# Altium PCB xiaoban.PcbDoc (part 2 of 2)
Units mm, origin at the board's own origin, x right, y up, seen from the top; angles counter-clockwise.
Board outline 80.34 x 99.39 mm, 2 copper layers (Top Layer, Bottom Layer); 120 components, 25 nets, 528 pads, 380 vias.
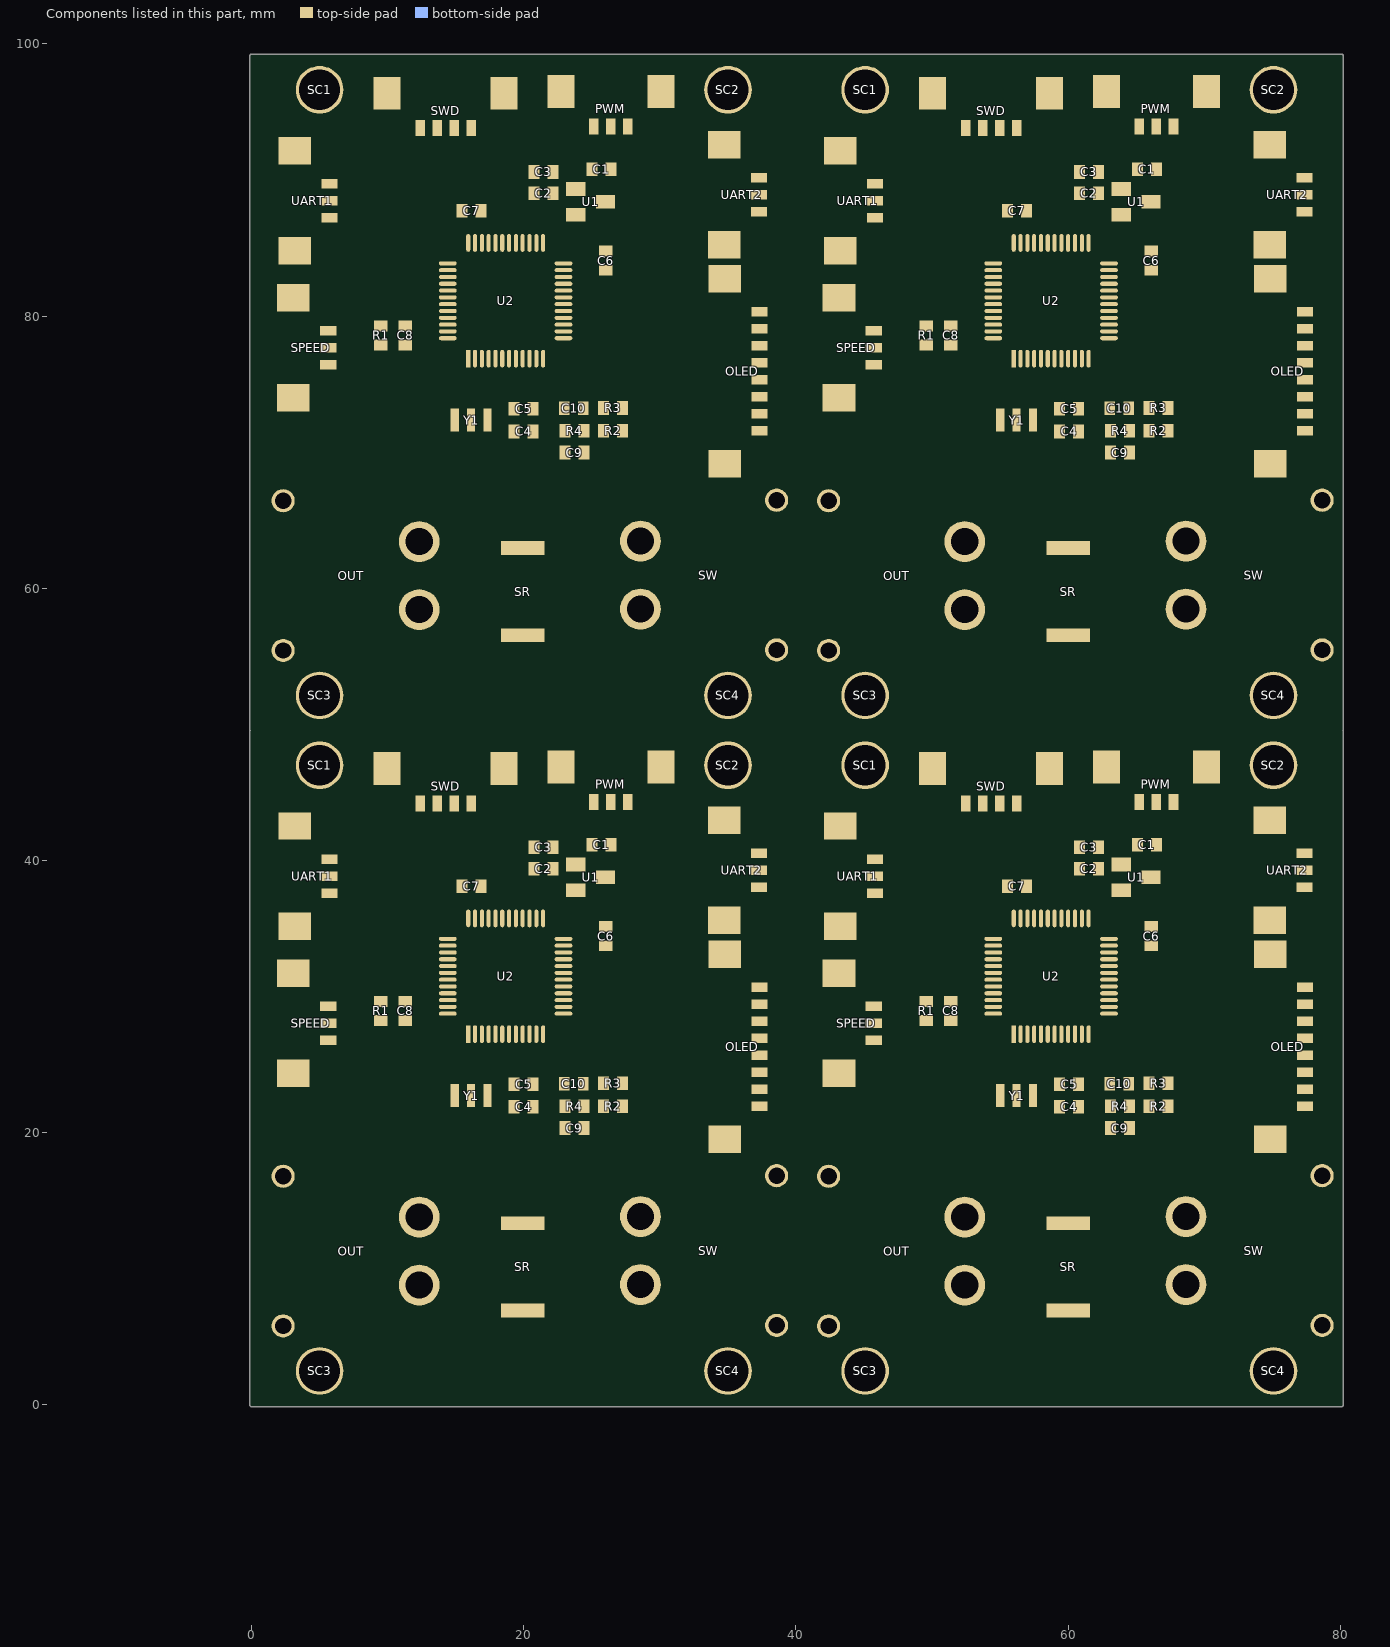
[diagram p2: the components of this part, seen from the top]

## Via types
v1: diameter 0.5, hole 0.3, Top Layer to Bottom Layer, tented both sides, 356 vias
v2: diameter 0.8, hole 0.5, Top Layer to Bottom Layer, tented both sides, 12 vias
v3: diameter 1, hole 0.5, Top Layer to Bottom Layer, tented both sides, 12 vias

## Nets (pads, with @x,y where several pads share a name; then routed paths per layer and width w, separated by ;. In a path a pad name is that pad's centre, name@x,y a point inside that pad or via, vN(x,y) a via of type N, cw(c..) or ccw(c..) an arc to the next point about the centre after c; other vN are vias at no path point) (continued)
pads on no net: C1.1@26.405,90.805 C1.1@66.486,41.173 C1.1@66.486,90.805 C1.2@25.005,90.805 C1.2@65.086,41.173 C1.2@65.086,90.805 C2.1@20.742,89.019 C2.1@60.824,39.387 C2.1@60.824,89.019 C2.2@22.142,89.019 C2.2@62.224,39.387 C2.2@62.224,89.019 C3.1@22.142,90.594 C3.1@62.224,40.962 C3.1@62.224,90.594 C3.2@20.742,90.594 C3.2@60.824,40.962 C3.2@60.824,90.594 C4.1@20.69,71.526 C4.1@60.771,21.895 C4.1@60.771,71.526 C4.2@19.29,71.526 C4.2@59.371,21.895 C4.2@59.371,71.526 C5.1@19.29,73.203 C5.1@59.371,23.571 C5.1@59.371,73.203 C5.2@20.69,73.203 C5.2@60.771,23.571 C5.2@60.771,73.203 C6.1@26.035,83.374 C6.1@66.116,33.742 C6.1@66.116,83.374 C6.2@26.035,84.774 C6.2@66.116,35.142 C6.2@66.116,84.774 C7.1@16.854,87.732 C7.1@56.936,38.1 C7.1@56.936,87.732 C7.2@15.454,87.732 C7.2@55.536,38.1 C7.2@55.536,87.732 C8.1@11.303,79.288 C8.1@51.384,29.656 C8.1@51.384,79.288 C8.2@11.303,77.888 C8.2@51.384,28.256 C8.2@51.384,77.888 C9.1@24.424,69.977 C9.1@64.505,20.345 C9.1@64.505,69.977 C9.2@23.024,69.977 C9.2@63.105,20.345 C9.2@63.105,69.977 C10.1@24.373,73.228 C10.1@64.454,23.597 C10.1@64.454,73.228 C10.2@22.973,73.228 C10.2@63.054,23.597 C10.2@63.054,73.228 OLED.1@37.323,80.321 OLED.1@77.404,30.689 OLED.1@77.404,80.321 OLED.2@37.323,79.071 OLED.2@77.404,29.439 OLED.2@77.404,79.071 OLED.3@37.323,77.821 OLED.3@77.404,28.189 OLED.3@77.404,77.821 OLED.4@37.323,76.571 OLED.4@77.404,26.939 OLED.4@77.404,76.571 OLED.5@37.323,75.321 OLED.5@77.404,25.689 OLED.5@77.404,75.321 OLED.6@37.323,74.071 OLED.6@77.404,24.439 OLED.6@77.404,74.071 OLED.7@37.323,72.821 OLED.7@77.404,23.19 OLED.7@77.404,72.821 OLED.8@37.323,71.571 OLED.8@77.404,21.94 OLED.8@77.404,71.571 OLED.NC OUT.0 OUT.1@12.319,58.435 OUT.1@52.4,8.803 OUT.1@52.4,58.435 OUT.2@12.319,63.435 OUT.2@52.4,13.803 OUT.2@52.4,63.435 PWM.1@27.656,93.945 PWM.1@67.737,44.313 PWM.1@67.737,93.945 PWM.2@26.406,93.945 PWM.2@66.487,44.313 PWM.2@66.487,93.945 PWM.3@25.156,93.945 PWM.3@65.237,44.313 PWM.3@65.237,93.945 PWM.NC R1.1@9.5,79.288 R1.1@49.581,29.656 R1.1@49.581,79.288 R1.2@9.5,77.888 R1.2@49.581,28.256 R1.2@49.581,77.888 R2.1@27.254,71.577 R2.1@67.335,21.946 R2.1@67.335,71.577 R2.2@25.854,71.577 R2.2@65.935,21.946 R2.2@65.935,71.577 R3.1@25.843,73.254 R3.1@65.924,23.622 R3.1@65.924,73.254 R3.2@27.243,73.254 R3.2@67.324,23.622 R3.2@67.324,73.254 R4.1@24.424,71.577 R4.1@64.505,21.946 R4.1@64.505,71.577 R4.2@23.024,71.577 R4.2@63.105,21.946 R4.2@63.105,71.577 SC1.0 SC2.0 SC3.0 SC4.0 SPEED.1@5.633,78.931 SPEED.1@45.715,29.3 SPEED.1@45.715,78.931 SPEED.2@5.633,77.681 SPEED.2@45.715,28.05 SPEED.2@45.715,77.681 SPEED.3@5.633,76.431 SPEED.3@45.715,26.8 SPEED.3@45.715,76.431 SPEED.NC SR.1@19.939,62.967 SR.1@60.02,13.335 SR.1@60.02,62.967 SR.2@19.939,56.567 SR.2@60.02,6.935 SR.2@60.02,56.567 SW.0 SW.1@28.575,63.475 SW.1@68.656,13.843 SW.1@68.656,63.475 SW.2@28.575,58.475 SW.2@68.656,8.843 SW.2@68.656,58.475 SWD.1@16.129,93.828 SWD.1@56.21,44.196 SWD.1@56.21,93.828 SWD.2@14.879,93.828 SWD.2@54.96,44.196 SWD.2@54.96,93.828 SWD.3@13.629,93.828 SWD.3@53.71,44.196 SWD.3@53.71,93.828 SWD.4@12.379,93.828 SWD.4@52.46,44.196 SWD.4@52.46,93.828 SWD.NC U1.1@23.817,89.342 U1.1@63.899,39.71 U1.1@63.899,89.342 U1.2@23.817,87.442 U1.2@63.899,37.81 U1.2@63.899,87.442 U1.3@26.017,88.392 U1.3@66.099,38.76 U1.3@66.099,88.392 U2.1@15.919,76.878 U2.1@56,27.246 U2.1@56,76.878 U2.2 U2.3 U2.4 U2.5@17.919,76.878 U2.5@58,27.246 U2.5@58,76.878 U2.6@18.419,76.878 U2.6@58.5,27.246 U2.6@58.5,76.878 U2.7@18.919,76.878 U2.7@59,27.246 U2.7@59,76.878 U2.8@19.419,76.878 U2.8@59.5,27.246 U2.8@59.5,76.878 U2.9@19.919,76.878 U2.9@60,27.246 U2.9@60,76.878 U2.10@20.419,76.878 U2.10@60.5,27.246 U2.10@60.5,76.878 U2.11@20.919,76.878 U2.11@61,27.246 U2.11@61,76.878 U2.12@21.419,76.878 U2.12@61.5,27.246 U2.12@61.5,76.878 U2.13@22.919,78.378 U2.13@63,28.746 U2.13@63,78.378 U2.14@22.919,78.878 U2.14@63,29.246 U2.14@63,78.878 U2.15@22.919,79.378 U2.15@63,29.746 U2.15@63,79.378 U2.16@22.919,79.878 U2.16@63,30.246 U2.16@63,79.878 U2.17@22.919,80.378 U2.17@63,30.746 U2.17@63,80.378 U2.18 U2.19@22.919,81.378 U2.19@63,31.746 U2.19@63,81.378 U2.20 U2.21@22.919,82.378 U2.21@63,32.746 U2.21@63,82.378 U2.22@22.919,82.878 U2.22@63,33.246 U2.22@63,82.878 U2.23@22.919,83.378 U2.23@63,33.746 U2.23@63,83.378 U2.24@22.919,83.878 U2.24@63,34.246 U2.24@63,83.878 U2.25 U2.26 U2.27 U2.28 U2.29 U2.30@18.919,85.378 U2.30@59,35.746 U2.30@59,85.378 U2.31@18.419,85.378 U2.31@58.5,35.746 U2.31@58.5,85.378 U2.32 U2.33 U2.34@16.919,85.378 U2.34@57,35.746 U2.34@57,85.378 U2.35@16.419,85.378 U2.35@56.5,35.746 U2.35@56.5,85.378 U2.36@15.919,85.378 U2.36@56,35.746 U2.36@56,85.378 U2.37@14.419,83.878 U2.37@54.5,34.246 U2.37@54.5,83.878 U2.38 U2.39 U2.40 U2.41@14.419,81.878 U2.41@54.5,32.246 U2.41@54.5,81.878 U2.42 U2.43 U2.44@14.419,80.378 U2.44@54.5,30.746 U2.44@54.5,80.378 U2.45 U2.46 U2.47@14.419,78.878 U2.47@54.5,29.246 U2.47@54.5,78.878 U2.48@14.419,78.378 U2.48@54.5,28.746 U2.48@54.5,78.378 UART1.1@5.725,89.734 UART1.1@45.806,40.102 UART1.1@45.806,89.734 UART1.2@5.725,88.484 UART1.2@45.806,38.852 UART1.2@45.806,88.484 UART1.3@5.725,87.234 UART1.3@45.806,37.602 UART1.3@45.806,87.234 UART1.NC UART2.1@37.297,90.166 UART2.1@77.378,40.534 UART2.1@77.378,90.166 UART2.2@37.297,88.915 UART2.2@77.378,39.284 UART2.2@77.378,88.915 UART2.3@37.297,87.665 UART2.3@77.378,38.034 UART2.3@77.378,87.665 UART2.NC Y1.1@14.929,72.365 Y1.1@55.01,22.733 Y1.1@55.01,72.365 Y1.2@16.129,72.365 Y1.2@56.21,22.733 Y1.2@56.21,72.365 Y1.3@17.329,72.365 Y1.3@57.41,22.733 Y1.3@57.41,72.365
copper on no net: | length 1510
  Top Layer w0.254: 5.598,78.939 7.844,78.939 8.357,79.451 8.357,81.382 8.853,81.878 14.419,81.878 ; 5.725,88.484 6.792,88.484 6.858,88.417 v1(6.858,88.392) ; 5.725,89.734 6.151,89.734 6.782,89.103 v1(6.833,89.103) ; 9.5,77.888 10.222,77.888 10.389,78.054 10.389,79.832 10.934,80.378 14.419,80.378 ; v1(10.109,89.027) 11.074,89.027 11.455,89.408 18.034,89.408 18.419,89.023 18.419,85.378 ; v1(10.541,89.687) 10.668,89.814 18.313,89.814 18.919,89.209 18.919,85.378 ; 11.303,77.888 12.178,77.888 12.668,78.378 14.419,78.378 15.552,78.378 15.919,78.01 15.919,76.878 ; v1(12.802,79.832) 11.848,79.832 11.303,79.288 12.229,79.288 12.639,78.878 14.419,78.878 ; v1(13.589,88.798) 13.589,86.639 14.419,85.809 14.419,83.878 ; v1(13.614,92.71) 13.614,93.69 13.691,93.766 13.629,93.828 ; v1(14.58,88.798) 14.58,86.487 15.113,85.954 15.113,84.582 15.39,84.305 16.612,84.305 16.919,84.613 16.919,85.378 ; v1(14.879,92.716) 14.879,93.828 ; 14.929,72.365 14.929,73.4 cw(c16.281,73.4) 16.281,74.752 16.764,74.752 ccw(c16.764,75.907) 17.919,75.907 17.919,76.878 ; 15.302,87.732 15.469,87.565 15.469,86.792 15.919,86.341 15.919,85.378 ; 15.454,87.732 v1(15.454,88.733) ; 16.419,85.378 16.419,86.345 16.854,86.781 16.854,87.579 ; 16.702,87.732 16.854,87.579 ; v1(16.866,88.773) 16.866,87.743 16.854,87.732 16.854,87.579 ; 17.329,72.365 17.329,73.514 cw(c18.11,73.514) 18.11,74.295 ccw(c18.11,74.604) 18.419,74.604 18.419,76.878 ; v1(18.618,72.531) 19.29,73.203 19.419,73.332 19.419,76.878 ; 18.919,76.878 18.919,74.367 18.089,73.537 18.089,71.903 18.313,71.679 19.29,71.679 ; 19.919,76.878 19.919,74.925 20.69,74.154 20.69,73.203 ; 20.419,76.878 20.419,75.618 22.276,73.762 22.276,71.577 23.024,71.577 ; 20.919,76.878 20.919,76.084 22.973,74.03 22.973,73.228 22.973,72.557 23.165,72.365 25.843,72.365 ; 21.419,76.878 v1@27.237,76.878 ; 22.142,89.019 22.465,89.342 23.817,89.342 24.061,89.586 v1(26.01,89.586) ; 22.919,78.378 22.919,77.792 23.19,77.521 v1(26.645,77.521) ; 22.919,78.878 22.948,78.907 26.224,78.907 31.902,73.228 34.595,73.228 36.252,71.571 37.323,71.571 ; 22.919,79.378 26.46,79.378 32.192,73.645 34.813,73.645 35.637,72.821 37.323,72.821 ; 22.919,79.878 26.667,79.878 32.474,74.071 37.323,74.071 ; 22.919,80.378 26.874,80.378 32.703,74.549 35.23,74.549 36.002,75.321 37.323,75.321 ; 22.919,81.378 26.818,81.378 27.656,82.215 27.656,93.945 ; 22.919,82.378 23.896,82.378 24.333,81.94 v1(26.568,81.94) ; 22.919,82.878 24.412,82.878 24.74,82.55 v1(27.076,82.55) ; 22.919,83.378 26.031,83.378 26.035,83.374 v1(27.113,83.374) ; 22.919,83.878 24.232,83.878 25.128,84.774 26.035,84.774 ; 23.024,69.977 23.024,70.177 24.424,71.577 ; 25.843,71.73 25.843,72.365 ; 25.843,73.254 25.843,72.365 ; v1(27.432,81.128) 28.118,81.813 28.118,89.535 28.748,90.166 37.297,90.166 ; v1(28.575,81.077) 28.575,88.443 29.048,88.915 37.297,88.915 ; v1(28.6,79.451) 31.481,76.571 37.323,76.571 ; v1(29.642,79.273) 31.094,77.821 37.323,77.821 ; 45.679,29.307 47.925,29.307 48.438,29.82 48.438,31.75 48.934,32.246 54.5,32.246 ; 45.679,78.939 47.925,78.939 48.438,79.451 48.438,81.382 48.934,81.878 54.5,81.878 ; 45.806,38.852 46.873,38.852 46.939,38.786 v1(46.939,38.76) ; 45.806,40.102 46.232,40.102 46.863,39.472 v1(46.914,39.472) ; 45.806,88.484 46.873,88.484 46.939,88.417 v1(46.939,88.392) ; 45.806,89.734 46.232,89.734 46.863,89.103 v1(46.914,89.103) ; 49.581,28.256 50.303,28.256 50.47,28.423 50.47,30.201 51.015,30.746 54.5,30.746 ; 49.581,77.888 50.303,77.888 50.47,78.054 50.47,79.832 51.015,80.378 54.5,80.378 ; v1(50.19,39.395) 51.156,39.395 51.537,39.776 58.115,39.776 58.5,39.391 58.5,35.746 ; v1(50.19,89.027) 51.156,89.027 51.537,89.408 58.115,89.408 58.5,89.023 58.5,85.378 ; v1(50.622,40.056) 50.749,40.183 58.395,40.183 59,39.577 59,35.746 ; v1(50.622,89.687) 50.749,89.814 58.395,89.814 59,89.209 59,85.378 ; 51.384,28.256 52.259,28.256 52.749,28.746 54.5,28.746 55.633,28.746 56,28.379 56,27.246 ; 51.384,77.888 52.259,77.888 52.749,78.378 54.5,78.378 55.633,78.378 56,78.01 56,76.878 ; v1(52.883,30.201) 51.929,30.201 51.384,29.656 52.31,29.656 52.72,29.246 54.5,29.246 ; v1(52.883,79.832) 51.929,79.832 51.384,79.288 52.31,79.288 52.72,78.878 54.5,78.878 ; v1(53.67,39.167) 53.67,37.008 54.5,36.178 54.5,34.246 ; v1(53.67,88.798) 53.67,86.639 54.5,85.809 54.5,83.878 ; v1(53.696,43.078) 53.696,44.058 53.772,44.134 53.71,44.196 ; v1(53.696,92.71) 53.696,93.69 53.772,93.766 53.71,93.828 ; v1(54.661,39.167) 54.661,36.855 55.194,36.322 55.194,34.95 55.471,34.674 56.693,34.674 57,34.981 57,35.746 ; v1(54.661,88.798) 54.661,86.487 55.194,85.954 55.194,84.582 55.471,84.305 56.693,84.305 57,84.613 57,85.378 ; v1(54.96,43.084) 54.96,44.196 ; v1(54.96,92.716) 54.96,93.828 ; 55.01,22.733 55.01,23.768 cw(c56.363,23.768) 56.363,25.121 56.845,25.121 ccw(c56.845,26.276) 58,26.276 58,27.246 ; 55.01,72.365 55.01,73.4 cw(c56.363,73.4) 56.363,74.752 56.845,74.752 ccw(c56.845,75.907) 58,75.907 58,76.878 ; 55.383,38.1 55.55,37.933 55.55,37.16 56,36.71 56,35.746 ; 55.383,87.732 55.55,87.565 55.55,86.792 56,86.341 56,85.378 ; 55.536,38.1 v1(55.536,39.102) ; 55.536,87.732 v1(55.536,88.733) ; 56.5,35.746 56.5,36.714 56.936,37.149 56.936,37.948 ; 56.5,85.378 56.5,86.345 56.936,86.781 56.936,87.579 ; 56.783,38.1 56.936,37.948 ; 56.783,87.732 56.936,87.579 ; v1(56.947,39.141) 56.947,38.111 56.936,38.1 56.936,37.948 ; v1(56.947,88.773) 56.947,87.743 56.936,87.732 56.936,87.579 ; 57.41,22.733 57.41,23.882 cw(c58.191,23.882) 58.191,24.663 ccw(c58.191,24.972) 58.5,24.972 58.5,27.246 ; 57.41,72.365 57.41,73.514 cw(c58.191,73.514) 58.191,74.295 ccw(c58.191,74.604) 58.5,74.604 58.5,76.878 ; v1(58.699,22.9) 59.371,23.571 59.5,23.7 59.5,27.246 ; v1(58.699,72.531) 59.371,73.203 59.5,73.332 59.5,76.878 ; 59,27.246 59,24.736 58.17,23.905 58.17,22.272 58.395,22.047 59.371,22.047 ; 59,76.878 59,74.367 58.17,73.537 58.17,71.903 58.395,71.679 59.371,71.679 ; 60,27.246 60,25.293 60.771,24.522 60.771,23.571 ; 60,76.878 60,74.925 60.771,74.154 60.771,73.203 ; 60.5,27.246 60.5,25.987 62.357,24.13 62.357,21.946 63.105,21.946 ; 60.5,76.878 60.5,75.618 62.357,73.762 62.357,71.577 63.105,71.577 ; 61,27.246 61,26.452 63.054,24.398 63.054,23.597 63.054,22.925 63.246,22.733 65.924,22.733 ; 61,76.878 61,76.084 63.054,74.03 63.054,73.228 63.054,72.557 63.246,72.365 65.924,72.365 ; 61.5,27.246 v1@67.318,27.246 ; 61.5,76.878 v1@67.318,76.878 ; 62.224,39.387 62.547,39.71 63.899,39.71 64.142,39.954 v1(66.091,39.954) ; 62.224,89.019 62.547,89.342 63.899,89.342 64.142,89.586 v1(66.091,89.586) ; 63,28.746 63,28.16 63.271,27.889 v1(66.726,27.889) ; 63,29.246 63.03,29.275 66.305,29.275 71.984,23.597 74.676,23.597 76.333,21.94 77.404,21.94 ; 63,29.746 66.541,29.746 72.274,24.014 74.894,24.014 75.718,23.19 77.404,23.19 ; 63,30.246 66.748,30.246 72.555,24.439 77.404,24.439 ; 63,30.746 66.956,30.746 72.784,24.917 75.311,24.917 76.083,25.689 77.404,25.689 ; 63,31.746 66.9,31.746 67.737,32.584 67.737,44.313 ; 63,32.746 63.977,32.746 64.414,32.309 v1(66.65,32.309) ; 63,33.246 64.493,33.246 64.821,32.918 v1(67.158,32.918) ; 63,33.746 66.113,33.746 66.116,33.742 v1(67.194,33.742) ; 63,34.246 64.313,34.246 65.209,35.142 66.116,35.142 ; 63,78.378 63,77.792 63.271,77.521 v1(66.726,77.521) ; 63,78.878 63.03,78.907 66.305,78.907 71.984,73.228 74.676,73.228 76.333,71.571 77.404,71.571 ; 63,79.378 66.541,79.378 72.274,73.645 74.894,73.645 75.718,72.821 77.404,72.821 ; 63,79.878 66.748,79.878 72.555,74.071 77.404,74.071 ; 63,80.378 66.956,80.378 72.784,74.549 75.311,74.549 76.083,75.321 77.404,75.321 ; 63,81.378 66.9,81.378 67.737,82.215 67.737,93.945 ; 63,82.378 63.977,82.378 64.414,81.94 v1(66.65,81.94) ; 63,82.878 64.493,82.878 64.821,82.55 v1(67.158,82.55) ; 63,83.378 66.113,83.378 66.116,83.374 v1(67.194,83.374) ; 63,83.878 64.313,83.878 65.209,84.774 66.116,84.774 ; 63.105,20.345 63.105,20.546 64.505,21.946 ; 63.105,69.977 63.105,70.177 64.505,71.577 ; 65.924,22.098 65.924,22.733 ; 65.924,23.622 65.924,22.733 ; 65.924,71.73 65.924,72.365 ; 65.924,73.254 65.924,72.365 ; v1(67.513,31.496) 68.199,32.182 68.199,39.903 68.83,40.534 77.378,40.534 ; v1(67.513,81.128) 68.199,81.813 68.199,89.535 68.83,90.166 77.378,90.166 ; v1(68.656,31.445) 68.656,38.811 69.129,39.284 77.378,39.284 ; v1(68.656,81.077) 68.656,88.443 69.129,88.915 77.378,88.915 ; v1(68.682,29.82) 71.562,26.939 77.404,26.939 ; v1(68.682,79.451) 71.562,76.571 77.404,76.571 ; v1(69.723,29.642) 71.176,28.189 77.404,28.189 ; v1(69.723,79.273) 71.176,77.821 77.404,77.821
  Top Layer w0.381: 22.922,66.232 22.922,69.977 ; 27.254,71.577 27.254,69.952 28.575,68.631 28.575,63.475 ; 63.003,16.6 63.003,20.345 ; 63.003,66.232 63.003,69.977 ; 67.335,21.946 67.335,20.32 68.656,18.999 68.656,13.843 ; 67.335,71.577 67.335,69.952 68.656,68.631 68.656,63.475
  Top Layer w0.508: 20.69,73.203 21.488,73.203 21.692,73 21.692,68.682 ; v2(30.607,86.258) 30.607,80.772 32.308,79.071 37.323,79.071 ; 60.771,23.571 61.57,23.571 61.773,23.368 61.773,19.05 ; 60.771,73.203 61.57,73.203 61.773,73 61.773,68.682 ; v2(70.688,36.627) 70.688,31.14 72.389,29.439 77.404,29.439 ; v2(70.688,86.258) 70.688,80.772 72.389,79.071 77.404,79.071
  Top Layer w0.762: 5.598,77.689 2.372,77.689 0.991,79.07 0.991,82.702 1.372,83.083 5.74,83.083 7.696,85.039 7.696,90.957 8.585,91.846 26.406,91.846 ; v2(7.061,77.648) 7.061,75.895 ; v2(7.087,80.721) 7.112,80.747 7.112,81.585 9.22,83.693 9.271,83.693 9.271,90.221 9.644,90.594 20.742,90.594 20.742,89.019 20.742,87.716 21.092,87.366 25.004,87.366 v3(26.035,86.335) 26.035,84.774 ; 11.303,77.888 11.303,76.479 10.719,75.895 7.061,75.895 ; 16.129,93.828 v3(17.856,93.828) ; 21.692,68.682 7.747,68.682 7.061,69.367 7.061,75.895 ; 26.379,88.475 26.848,88.943 26.848,91.405 26.406,91.846 ; 26.406,93.945 26.406,91.846 ; 45.679,28.057 42.453,28.057 41.072,29.439 41.072,33.071 41.453,33.452 45.822,33.452 47.777,35.408 47.777,41.326 48.666,42.215 66.487,42.215 ; 45.679,77.689 42.453,77.689 41.072,79.07 41.072,82.702 41.453,83.083 45.822,83.083 47.777,85.039 47.777,90.957 48.666,91.846 66.487,91.846 ; v2(47.142,28.016) 47.142,26.264 ; v2(47.142,77.648) 47.142,75.895 ; v2(47.168,31.09) 47.193,31.115 47.193,31.953 49.301,34.061 49.352,34.061 49.352,40.589 49.725,40.962 60.824,40.962 60.824,39.387 60.824,38.084 61.173,37.734 65.085,37.734 v3(66.116,36.703) 66.116,35.142 ; v2(47.168,80.721) 47.193,80.747 47.193,81.585 49.301,83.693 49.352,83.693 49.352,90.221 49.725,90.594 60.824,90.594 60.824,89.019 60.824,87.716 61.173,87.366 65.085,87.366 v3(66.116,86.335) 66.116,84.774 ; 51.384,28.256 51.384,26.848 50.8,26.264 47.142,26.264 ; 51.384,77.888 51.384,76.479 50.8,75.895 47.142,75.895 ; 56.21,44.196 v3(57.937,44.196) ; 56.21,93.828 v3(57.937,93.828) ; 61.773,19.05 47.828,19.05 47.142,19.736 47.142,26.264 ; 61.773,68.682 47.828,68.682 47.142,69.367 47.142,75.895 ; 66.461,38.843 66.929,39.311 66.929,41.773 66.487,42.215 ; 66.461,88.475 66.929,88.943 66.929,91.405 66.487,91.846 ; 66.487,44.313 66.487,42.215 ; 66.487,93.945 66.487,91.846
  Top Layer w2.54: 12.319,63.435 17.653,63.435 ; 22.098,56.54 26.641,56.54 28.575,58.475 ; 52.4,13.803 57.734,13.803 ; 52.4,63.435 57.734,63.435 ; 62.179,6.909 66.722,6.909 68.656,8.843 ; 62.179,56.54 66.722,56.54 68.656,58.475
  Bottom Layer w0.254: v1(6.833,89.103) 6.833,89.052 6.858,89.027 v1(10.109,89.027) ; v1(6.858,88.392) 10.266,88.392 10.647,88.773 10.639,88.781 10.639,89.59 v1(10.541,89.687) ; v1(12.802,79.832) v1@12.852,79.781 ; v1(13.589,88.798) 13.589,92.634 13.64,92.685 v1(13.614,92.71) ; v1(14.58,88.798) 14.58,92.416 v1(14.879,92.716) ; v1(15.443,90.576) 15.454,90.565 v1(15.454,88.733) ; v1(16.866,88.773) 16.866,88.951 v1@16.916,89.002 ; v1@26.594,81.89 27.356,81.128 v1(27.432,81.128) ; v1(26.645,77.521) 28.575,79.451 v1(28.6,79.451) ; v1(27.076,82.55) 28.55,81.077 v1(28.575,81.077) ; v1(27.113,83.374) v1@27.127,83.388 ; v1(27.254,76.886) v1(29.642,79.273) ; v1(46.914,39.472) 46.914,39.421 46.939,39.395 v1(50.19,39.395) ; v1(46.914,89.103) 46.914,89.052 46.939,89.027 v1(50.19,89.027) ; v1(46.939,38.76) 50.347,38.76 50.728,39.141 50.72,39.149 50.72,39.958 v1(50.622,40.056) ; v1(46.939,88.392) 50.347,88.392 50.728,88.773 50.72,88.781 50.72,89.59 v1(50.622,89.687) ; v1(52.883,30.201) v1@52.934,30.15 ; v1(52.883,79.832) v1@52.934,79.781 ; v1(53.67,39.167) 53.67,43.002 53.721,43.053 v1(53.696,43.078) ; v1(53.67,88.798) 53.67,92.634 53.721,92.685 v1(53.696,92.71) ; v1(54.661,39.167) 54.661,42.785 v1(54.96,43.084) ; v1(54.661,88.798) 54.661,92.416 v1(54.96,92.716) ; v1(55.524,40.945) 55.536,40.934 v1(55.536,39.102) ; v1(55.524,90.576) 55.536,90.565 v1(55.536,88.733) ; v1(56.947,39.141) 56.947,39.319 v1@56.998,39.37 ; v1(56.947,88.773) 56.947,88.951 v1@56.998,89.002 ; v1@66.675,32.258 67.437,31.496 v1(67.513,31.496) ; v1@66.675,81.89 67.437,81.128 v1(67.513,81.128) ; v1(66.726,27.889) 68.656,29.82 v1(68.682,29.82) ; v1(66.726,77.521) 68.656,79.451 v1(68.682,79.451) ; v1(67.158,32.918) 68.631,31.445 v1(68.656,31.445) ; v1(67.158,82.55) 68.631,81.077 v1(68.656,81.077) ; v1(67.194,33.742) v1@67.208,33.757 ; v1(67.194,83.374) v1@67.208,83.388 ; v1(67.335,27.254) v1(69.723,29.642) ; v1(67.335,76.886) v1(69.723,79.273)
  Bottom Layer w0.762: v2(7.061,77.648) v2@7.087,77.673 ; v2@7.087,77.648 v2@7.087,77.673 ; v2(7.087,80.721) v2@7.087,77.673 ; v3(17.856,90.602) v3(17.856,93.828) ; v3(26.035,86.335) 30.531,86.335 v2(30.607,86.258) ; v2(47.142,28.016) v2@47.168,28.042 ; v2(47.142,77.648) v2@47.168,77.673 ; v2@47.168,28.016 v2@47.168,28.042 ; v2(47.168,31.09) v2@47.168,28.042 ; v2@47.168,77.648 v2@47.168,77.673 ; v2(47.168,80.721) v2@47.168,77.673 ; v3(57.937,40.97) v3(57.937,44.196) ; v3(57.937,90.602) v3(57.937,93.828) ; v3(66.116,36.703) 70.612,36.703 v2(70.688,36.627) ; v3(66.116,86.335) 70.612,86.335 v2(70.688,86.258)
  Bottom Layer w2.54: 12.319,58.435 19.115,58.435 24.155,63.475 28.575,63.475 ; 52.4,8.803 59.197,8.803 64.237,13.843 68.656,13.843 ; 52.4,58.435 59.197,58.435 64.237,63.475 68.656,63.475
  other v1: 66.599,18.999 65.405,19.025 69.444,19.38 45.06,19.964 48.997,20.853 50.267,20.853 51.791,20.853 53.315,20.853 54.585,20.853 56.109,20.853 57.633,20.853 69.444,20.904 43.129,21.006 45.06,21.234 71.45,21.514 73.025,21.514 75.006,21.514 69.444,22.428 43.129,22.53 45.06,22.758 69.444,23.698 50.267,24.155 51.791,24.155 53.315,24.155 48.997,24.181 45.06,24.282 53.315,25.425 54.585,25.425 63.475,26.34 64.999,26.34 66.523,26.34 67.793,26.34 42.647,26.568 43.993,26.695 53.315,26.949 54.585,26.949 51.181,31.445 52.578,31.445 77.419,32.334 72.339,32.487 77.419,33.604 72.339,33.757 77.419,35.128 72.339,35.281 77.419,36.652 43.205,36.754 72.339,36.805 43.205,38.024 43.205,39.548 64.059,40.691 63.17,40.716 43.205,41.072 63.17,41.402 64.084,41.402 46.609,43.561 47.879,43.561 49.403,43.561 50.927,43.561 52.095,46.457 53.365,46.457 54.889,46.457 56.413,46.457 64.313,46.736 65.583,46.736 67.107,46.736 68.631,46.736 26.518,68.631 66.599,68.631 25.324,68.656 65.405,68.656 29.362,69.012 69.444,69.012 4.978,69.596 45.06,69.596 8.915,70.485 10.185,70.485 11.709,70.485 13.233,70.485 14.503,70.485 16.027,70.485 17.551,70.485 48.997,70.485 50.267,70.485 51.791,70.485 53.315,70.485 54.585,70.485 56.109,70.485 57.633,70.485 29.362,70.536 69.444,70.536 3.048,70.637 43.129,70.637 4.978,70.866 45.06,70.866 31.369,71.145 32.944,71.145 34.925,71.145 71.45,71.145 73.025,71.145 75.006,71.145 29.362,72.06 69.444,72.06 3.048,72.161 43.129,72.161 4.978,72.39 45.06,72.39 29.362,73.33 69.444,73.33 10.185,73.787 11.709,73.787 13.233,73.787 50.267,73.787 51.791,73.787 53.315,73.787 8.915,73.812 48.997,73.812 4.978,73.914 45.06,73.914 13.233,75.057 14.503,75.057 53.315,75.057 54.585,75.057 23.393,75.971 24.917,75.971 26.441,75.971 27.711,75.971 63.475,75.971 64.999,75.971 66.523,75.971 67.793,75.971 2.565,76.2 42.647,76.2 3.912,76.327 43.993,76.327 13.233,76.581 14.503,76.581 53.315,76.581 54.585,76.581 11.1,81.077 12.497,81.077 51.181,81.077 52.578,81.077 37.338,81.966 77.419,81.966 32.258,82.118 72.339,82.118 37.338,83.236 77.419,83.236 32.258,83.388 72.339,83.388 37.338,84.76 77.419,84.76 32.258,84.912 72.339,84.912 37.338,86.284 77.419,86.284 3.124,86.385 43.205,86.385 32.258,86.436 72.339,86.436 3.124,87.655 43.205,87.655 3.124,89.179 43.205,89.179 23.978,90.322 64.059,90.322 23.089,90.348 63.17,90.348 3.124,90.703 43.205,90.703 23.089,91.034 24.003,91.034 63.17,91.034 64.084,91.034 6.528,93.193 7.798,93.193 9.322,93.193 10.846,93.193 46.609,93.193 47.879,93.193 49.403,93.193 50.927,93.193 12.014,96.088 13.284,96.088 14.808,96.088 16.332,96.088 52.095,96.088 53.365,96.088 54.889,96.088 56.413,96.088 24.232,96.368 25.502,96.368 27.026,96.368 28.55,96.368 64.313,96.368 65.583,96.368 67.107,96.368 68.631,96.368

## Polygon pours and split planes (outlines as drawn)
no net on Top Layer "NONET_L01_P072" (solid, remove dead copper, pour order 72): 65.303,9.017 65.303,16.967 71.933,16.967 71.933,4.648 56.667,4.648 56.667,9.017
no net on Top Layer "NONET_L01_P070" (solid, remove dead copper, pour order 70): 48.971,17.018 48.971,10.973 63.195,10.973 63.195,17.018
no net on Top Layer "NONET_L01_P068" (solid, remove dead copper, pour order 68): 41.58,18.288 78.588,18.288 78.588,48.082 78.613,48.108 41.58,48.108
no net on Top Layer "NONET_L01_P066" (solid, remove dead copper, pour order 66): 61.443,42.164 61.493,42.215 65.862,42.215 66.243,42.215 67.107,41.351 66.777,41.021 66.777,37.948 61.443,37.948 61.417,37.973
no net on Top Layer "NONET_L01_P060" (solid, remove dead copper, pour order 60): 65.303,58.649 65.303,66.599 71.933,66.599 71.933,54.28 56.667,54.28 56.667,58.649
no net on Top Layer "NONET_L01_P058" (solid, remove dead copper, pour order 58): 48.971,66.65 48.971,60.604 63.195,60.604 63.195,66.65
no net on Top Layer "NONET_L01_P056" (solid, remove dead copper, pour order 56): 41.58,67.92 78.588,67.92 78.588,97.714 78.613,97.739 41.58,97.739
no net on Top Layer "NONET_L01_P054" (solid, remove dead copper, pour order 54): 61.443,91.796 61.493,91.846 65.862,91.846 66.243,91.846 67.107,90.983 66.777,90.653 66.777,87.579 61.443,87.579 61.417,87.605
no net on Top Layer "NONET_L01_P048" (solid, remove dead copper, pour order 48): 25.222,58.649 25.222,66.599 31.852,66.599 31.852,54.28 16.586,54.28 16.586,58.649
no net on Top Layer "NONET_L01_P046" (solid, remove dead copper, pour order 46): 8.89,66.65 8.89,60.604 23.114,60.604 23.114,66.65
no net on Top Layer "NONET_L01_P044" (solid, remove dead copper, pour order 44): 1.499,67.92 38.506,67.92 38.506,97.714 38.532,97.739 1.499,97.739
no net on Top Layer "NONET_L01_P042" (solid, remove dead copper, pour order 42): 21.361,91.796 21.412,91.846 25.781,91.846 26.162,91.846 27.026,90.983 26.695,90.653 26.695,87.579 21.361,87.579 21.336,87.605
GND on Top Layer "GND_L01_P016" (solid, remove dead copper, pour order 16): 21.361,42.164 21.412,42.215 25.781,42.215 26.162,42.215 27.026,41.351 26.695,41.021 26.695,37.948 21.361,37.948 21.336,37.973
GND on Top Layer "GND_L01_P014" (solid, remove dead copper, pour order 14): 1.499,18.288 38.506,18.288 38.506,48.082 38.532,48.108 1.499,48.108
NetC9_2 on Top Layer "NETC9_2_L01_P000" (solid, remove dead copper, pour order 0): 8.89,17.018 8.89,10.973 23.114,10.973 23.114,17.018
GND on Top Layer "GND_L01_P002" (solid, remove dead copper, pour order 2): 25.222,9.017 25.222,16.967 31.852,16.967 31.852,4.648 16.586,4.648 16.586,9.017
no net on Bottom Layer "NONET_L02_P076" (solid, remove dead copper, pour order 76): 48.997,11.455 48.997,5.436 60.477,5.436 66.192,11.151 71.272,11.151 71.272,17.018 63.297,17.018 57.734,11.455
no net on Bottom Layer "NONET_L02_P074" (solid, remove dead copper, pour order 74): 41.58,18.288 78.588,18.288 78.588,48.082 78.613,48.108 41.58,48.108
no net on Bottom Layer "NONET_L02_P064" (solid, remove dead copper, pour order 64): 48.997,61.087 48.997,55.067 60.477,55.067 66.192,60.782 71.272,60.782 71.272,66.65 63.297,66.65 57.734,61.087
no net on Bottom Layer "NONET_L02_P062" (solid, remove dead copper, pour order 62): 41.58,67.92 78.588,67.92 78.588,97.714 78.613,97.739 41.58,97.739
no net on Bottom Layer "NONET_L02_P052" (solid, remove dead copper, pour order 52): 8.915,61.087 8.915,55.067 20.396,55.067 26.111,60.782 31.191,60.782 31.191,66.65 23.216,66.65 17.653,61.087
no net on Bottom Layer "NONET_L02_P050" (solid, remove dead copper, pour order 50): 1.499,67.92 38.506,67.92 38.506,97.714 38.532,97.739 1.499,97.739
GND on Bottom Layer "GND_L02_P012" (solid, remove dead copper, pour order 12): 1.499,18.288 38.506,18.288 38.506,48.082 38.532,48.108 1.499,48.108
VCC12V on Bottom Layer "VCC12V_L02_P010" (solid, remove dead copper, pour order 10): 8.915,11.455 8.915,5.436 20.396,5.436 26.111,11.151 31.191,11.151 31.191,17.018 23.216,17.018 17.653,11.455

## Keep-outs
Keep-Out Layer:
  lines w0.254: 0,0 0,49.5 40,49.5 40,0 0,0 ; 0,49.632 40,49.632 40,99.132 0,99.132 0,49.632 ; 40.081,0 80.081,0 80.081,49.5 40.081,49.5 40.081,0 ; 40.081,49.632 80.081,49.632 80.081,99.132 40.081,99.132 40.081,49.632

## Other copper
Top Layer:
  rectangle: 70.256,16.51 71.247,18.796
  rectangle: 70.256,66.142 71.247,68.428
  rectangle: 30.175,66.142 31.166,68.428
  rectangle net GND: 30.175,16.51 31.166,18.796

## Silkscreen, mask and mechanical layers (free items; w line width, h text height)
Top Overlay:
  lines w0.254: -12.9,1.474 -12.395,-0.051 ; -12.805,47.601 -12.294,49.124 ; -12.649,-0.05 -12.141,-0.051 ; -12.548,49.124 -12.04,49.123 ; -12.361,16.639 -12.395,-0.051 ; -12.328,32.433 -12.294,49.124 ; -11.884,1.472 -12.395,-0.051 ; -11.789,47.599 -12.294,49.124 ; -5.105,97.663 -4.597,99.187 ; -5.08,1.524 -4.572,0 ; -4.851,99.187 -4.343,99.187 ; -4.826,0 -4.318,0 ; -4.587,57.49 -4.597,99.187 ; -4.583,41.697 -4.572,0 ; -4.089,97.663 -4.597,99.187 ; -4.064,1.524 -4.572,0 ; 0,-4.826 0,-4.318 ; 0.101,-13.564 0.102,-13.056 ; 1.524,-5.08 0,-4.572 ; 1.524,-4.064 0,-4.572 ; 1.625,-13.82 0.102,-13.31 ; 1.627,-12.805 0.102,-13.31 ; 12.106,-13.332 0.102,-13.31 ; 28.153,-13.363 40.157,-13.386 ; 32.286,-4.582 0,-4.572 ; 38.632,-13.891 40.157,-13.386 ; 38.634,-12.875 40.157,-13.386 ; 40.157,-13.64 40.158,-13.132 ; 47.826,-4.587 80.112,-4.597 ; 78.587,-5.105 80.112,-4.597 ; 78.588,-4.089 80.112,-4.597 ; 80.112,-4.851 80.112,-4.343
  text "99.187 (mm)" at -5.501,57.236 h1.52 r270.01
  text "49.175 (mm)" at -11.446,16.892 h1.52 r89.88
  text "80.112 (mm)" at 32.539,-5.496 h1.52 r359.98
  text "40.056 (mm)" at 12.358,-14.247 h1.52 r359.89

## Text inside footprints (layer, text, board x,y; h text height)
OUT: Top Overlay "+" at 52.019,5.842 h0.8 r270; Top Overlay "-" at 52.273,17.018 h0.8 r270
OUT: Top Overlay "+" at 52.019,55.474 h0.8 r270; Top Overlay "-" at 52.273,66.65 h0.8 r270
OUT: Top Overlay "+" at 11.938,55.474 h0.8 r270; Top Overlay "-" at 12.192,66.65 h0.8 r270
OUT: Top Overlay "+" at 11.938,5.842 h0.8 r270; Top Overlay "-" at 12.192,17.018 h0.8 r270
SW: Top Overlay "-" at 68.783,5.628 h0.8 r90; Top Overlay "+" at 69.037,16.804 h0.8 r90
SW: Top Overlay "-" at 68.783,55.26 h0.8 r90; Top Overlay "+" at 69.037,66.436 h0.8 r90
SW: Top Overlay "-" at 28.702,55.26 h0.8 r90; Top Overlay "+" at 28.956,66.436 h0.8 r90
SW: Top Overlay "-" at 28.702,5.628 h0.8 r90; Top Overlay "+" at 28.956,16.804 h0.8 r90